# Altium PCB PCB1.pcbdoc
Units mil, origin at the board's own origin, x right, y up, seen from the top; angles counter-clockwise.
Board outline 1480 x 2560 mil, 2 copper layers (Top Layer, Bottom Layer), stack 62.206 mil thick; 53 components, 46 nets, 201 pads, 81 vias.
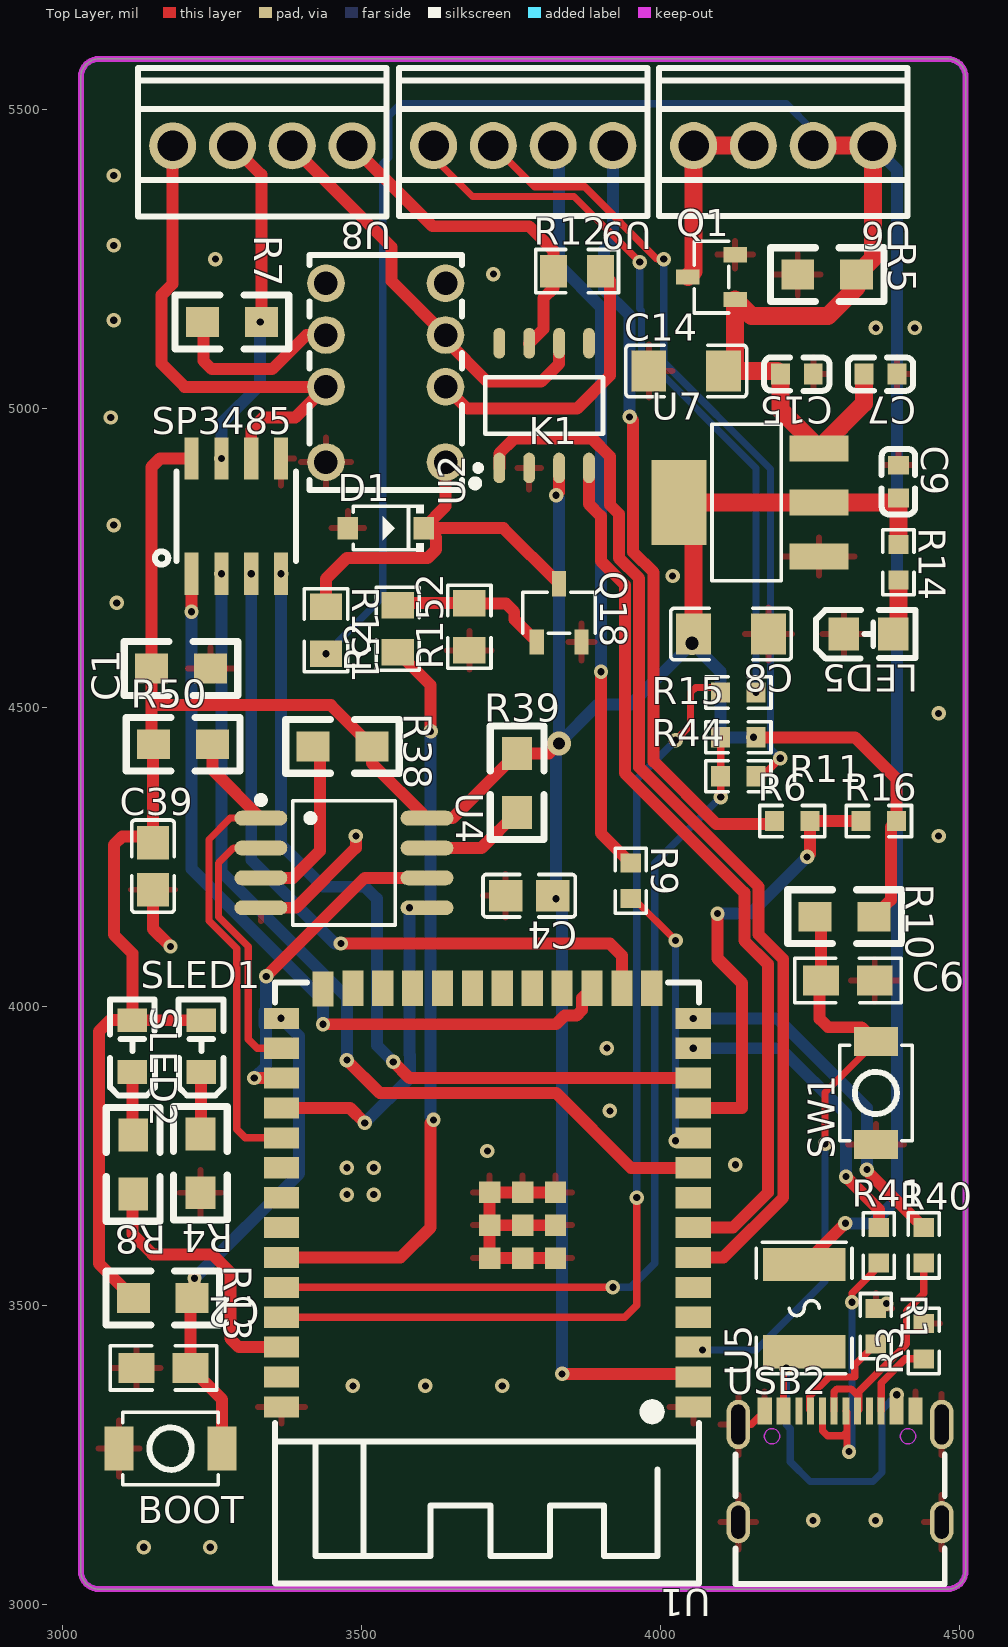
[diagram p0: Top Layer view]
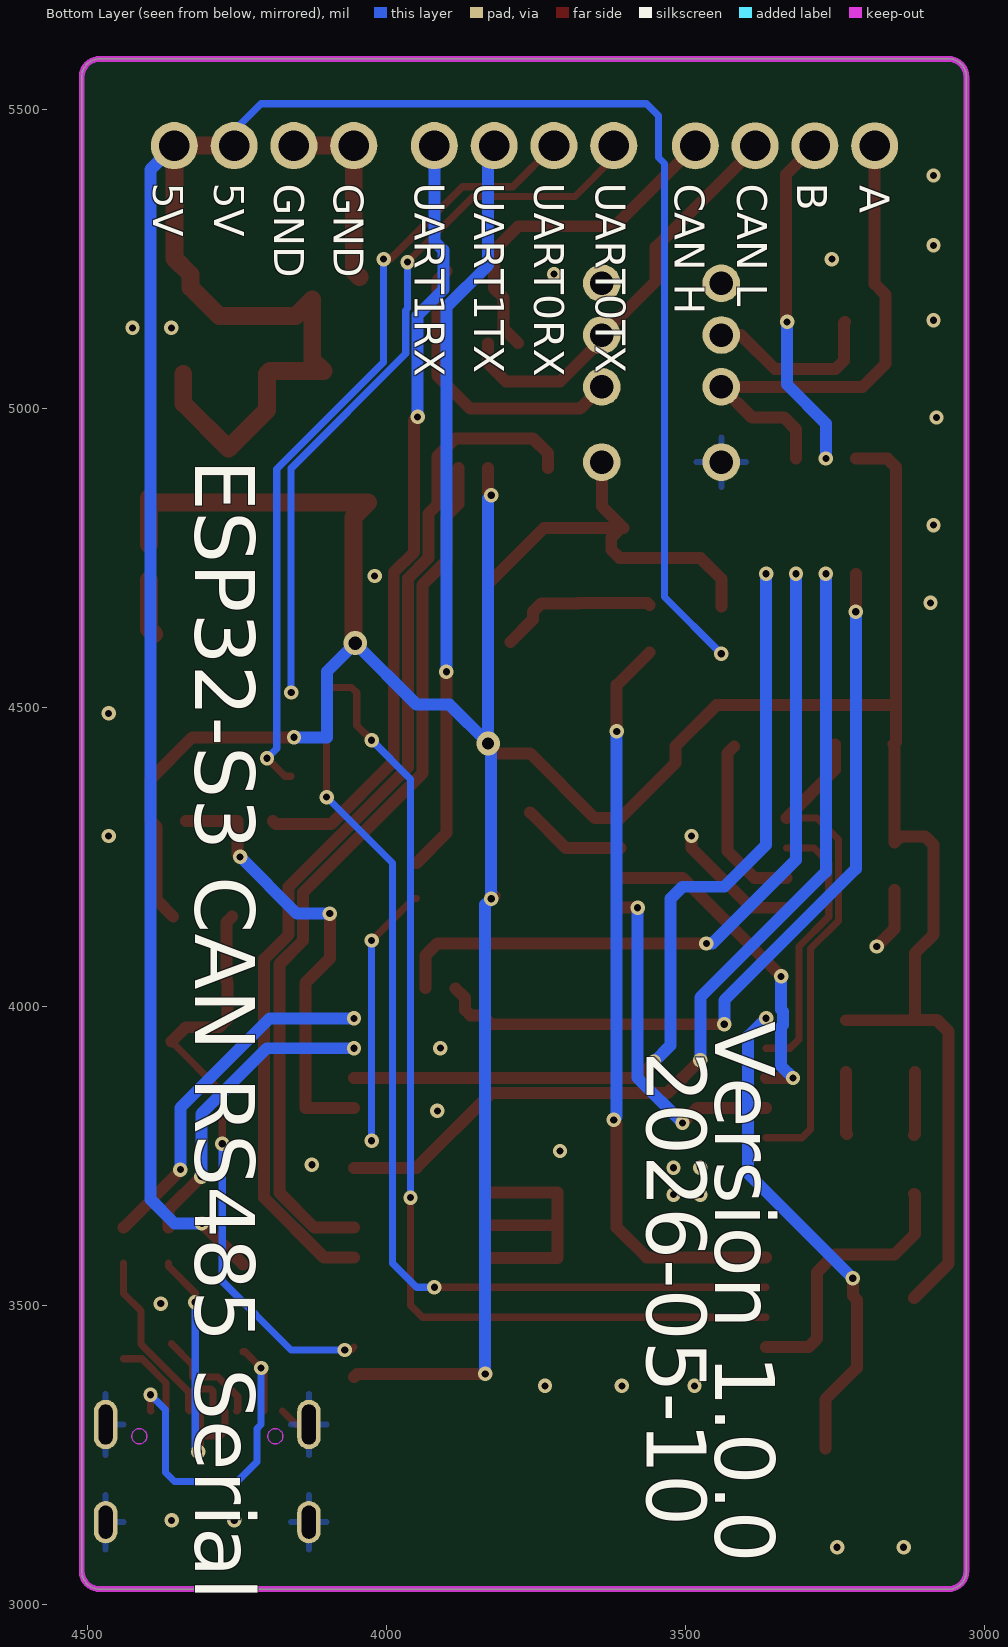
[diagram p1: Bottom Layer view, seen from below]

## Layer stack, top to bottom
Top Solder Mask Layer: solder mask 0.394, Dk 3.3
Top Layer: signal copper 1.379
Dielectric1: surface 59.449, FR4, Dk 4.5
Bottom Layer: signal copper 1.378
Bottom Solder Mask Layer: solder mask 0.394, Dk 3.3

## Board outline
3060,5585 4480,5585 cw(c4480,5555) 4510,5555 4510,3055 cw(c4480,3055) 4480,3025 3060,3025 cw(c3060,3055) 3030,3055 3030,5555 cw(c3060,5555)

## Design rules (kind name [scope] priority, off if disabled: settings)
BoardOutlineClearance copperThickness1oz [All] p0: genericclearance=10 ignorepadtopadclearanceinfootprint=FALSE except(0: Arc-SplitContinuation Track-SplitContinuation SMDPad-SplitContinuation THPad-SplitContinuation Via-SplitContinuation Fill-SplitContinuation Poly-SplitContinuation Region-SplitContinuation Text-SplitContinuation)
BoardOutlineClearance copperThickness2oz [All] p0: genericclearance=10 ignorepadtopadclearanceinfootprint=FALSE except(0: Arc-SplitContinuation Track-SplitContinuation SMDPad-SplitContinuation THPad-SplitContinuation Via-SplitContinuation Fill-SplitContinuation Poly-SplitContinuation Region-SplitContinuation Text-SplitContinuation)
BoardOutlineClearance otherClearance [All] p0: genericclearance=10 ignorepadtopadclearanceinfootprint=FALSE except(0: Arc-SplitContinuation Track-SplitContinuation SMDPad-SplitContinuation THPad-SplitContinuation Via-SplitContinuation Fill-SplitContinuation Poly-SplitContinuation Region-SplitContinuation Text-SplitContinuation)
Clearance copperThickness1oz [All] p1: gap=7 ignorepadtopadclearanceinfootprint=FALSE
Clearance copperThickness2oz [All] p1: gap=7 ignorepadtopadclearanceinfootprint=FALSE
Clearance otherClearance [All] p1: gap=7 ignorepadtopadclearanceinfootprint=FALSE
DiffPairsRouting differentialPair [All] p1: maxuncoupledlength=10 minlimit=6 maxlimit=Infinity mostfreqgap=6 toplayer_minwidth=5 toplayer_prefwidth=10 toplayer_maxwidth=100 bottomlayer_minwidth=5 bottomlayer_prefwidth=10 bottomlayer_maxwidth=100
PasteMaskExpansion pasteMaskExpansion [All] p1: expansion=0
PlaneConnect innerPlane [All] p1: planeconnectstyle=Relief reliefexpansion=20 reliefentries=4 reliefconductorwidth=10 reliefairgap=10
PolygonConnect copperRegion [All] p1: connectstyle=Relief reliefentries=4 reliefconductorwidth=10 polygonreliefangle="90 Angle" airgapwidth=10
RoutingVias viaSize [All] p1: viastyle="Through Hole" holewidth=12.0078 minholewidth=11.811 maxholewidth=248.0314 width=12.0078 minwidth=11.811 maxwidth=248.0314
SolderMaskExpansion solderMaskExpansion [All] p1: useseparateexpansions=TRUE expansion=2 expansionbottom=2
Width copperThickness1oz [All] p1: maxlimit=100 minlimit=5 preferedwidth=10
Width copperThickness2oz [All] p1: maxlimit=100 minlimit=8 preferedwidth=10

## Components (designator, comment, footprint, x,y, rotation, side; value= is the part's Value field where it differs from the comment)
BOOT "" SW-SMD_L3.9-W3.0-P4.45 3180,3260 r0 top
C1 "" ?#1 3095,4510 r180 top
C2 "" ?#2 3329.28,3512.09 r180 top
C4 "" C0805 3780,4185 r180 top
C6 "" ?#2 4152.09,3926.11 r0 top
C7 "" C0603 4367.72,5057.76 r180 top
C8 "" ?#3 4117.72,4622.76 r180 top
C9 "" C0603 4397.72,4877.76 r270 top
C14 "" ?#3 4042.72,5062.76 r0 top
C15 "" C0603 4227.72,5057.76 r180 top
C39 "" C0805 3150.63,4234.37 r270 top
D1 "" SOD-123_L2.7-W1.6-LS3.7-FD 3540,4800 r0 top
K1 "" RELAY-TH_HFDXXX 3540,5060 r90 top
LED5 "" ?#4 4347.72,4622.76 r180 top
Q1 "" SOT-23-3_L2.9-W1.3-P1.90-LS2.4-BR 4085,5220 r0 top
Q18 "" SOT-23-3_L2.9-W1.6-P1.90-LS2.8-BR 3830,4658.29 r270 top
R1 "" R0603 4360,3465 r90 top
R2 "" R0805 3560,4631.69 r90 top
R3 "" R0603 4440,3440 r90 top
R4 "" ?#1 3285,3635 r270 top
R5 "" ?#1 4380.89,5279.1 r0 top
R6 "" R0603 4220,4310 r0 top
R7 "" ?#1 3385,5200 r0 top
R8 "" ?#1 3172.59,3633.14 r270 top
R9 "" R0603 3950,4210 r270 top
R10 "" ?#1 4410,4205 r0 top
R11 "" R0603 4130,4385 r180 top
R12 "" R0805 3860,5230 r0 top
R13 "" ?#1 3269.28,3567.09 r0 top
R14 "" R0603 4397.72,4742.76 r270 top
R15 "" R0603 4130,4525 r180 top
R16 "" R0603 4365,4310 r0 top
R38 "" ?#1 3570,4490 r0 top
R39 "" ?#1 3704.8,4476.2 r90 top
R40 "" R0603 4440,3600 r90 top
R41 "" R0603 4365,3600 r90 top
R44 "" R0603 4130,4450 r0 top
R50 "" ?#1 3098.5,4383.3 r180 top
R151 "" R0805 3440,4629.19 r270 top
R152 "" R0805 3680,4635 r90 top
SLED1 "" ?#5 3231.21,3933.4 r90 top
SLED2 "" ?#5 3116.21,3933.4 r90 top
SP3485 "" SO-8_L4.9-W3.9-P1.27-LS6.0-BL 3290,4820 r0 top
SW1 "" SW-SMD_L3.9-W3.0-P4.45 4360,3855 r90 top
U1 "" WIRELM-SMD_ESP32-S3-WROOM-1 3710,3680 r180 top
U2 "" SO-8 3805,5005 r90 top
U4 "" SOIC-8_L5.3-W5.3-P1.27-LS8.0-BL 3470,4239.86 r270 top
U5 "" F1812 4240,3495 r90 top
U6 "" CONN-TH_4P-P2.54_KF128-2.54-4P 4205,5440 r180 top
U7 "" ?#6 4147.72,4842.76 r0 top
U8 "" CONN-TH_4P-P2.54_KF128-2.54-4P 3333.57,5439.59 r180 top
U9 "" CONN-TH_4P-P2.54_KF128-2.54-4P 3770,5440 r180 top
USB2 "" USB-C-SMD_TYPE-C16PIN 4300,3230 r0 top

## Footprints (in the part's own frame and the unit in brackets; to place one, negate y for a bottom-side part, rotate by r counter-clockwise, add the part's x,y. Pads: shape width x height; smd on the part's side, far side on the other; paste and mask are expansions set on the pad)
C0603 [mm]
  rect 0.8x0.9 smd: 1(-0.7,0) 2(0.7,0)
  silkscreen extent -1.39,-0.71 1.39,0.71
C0805 [mm]
  rect 1.41x1.35 smd: 1(-1,0) 2(1,0)
  silkscreen extent -1.96,-0.9 1.96,0.9
CONN-TH_4P-P2.54_KF128-2.54-4P [mm]
  round 2 hole 1.3: 1(-3.81,0) 2(-1.27,0) 3(1.27,0) 4(3.81,0)
  silkscreen extent -5.28,-3.3 5.28,3
F1812 [mil]
  rect 55.38x137.76 smd: 1(-72.97,0) 2(72.97,0)
  silkscreen extent -110,-80 110,80
R0603 [mil]
  rect 31.75x34.02 smd: 1(-29.66,0) 2(29.66,0)
  silkscreen extent -55,-26 55,26
R0805 [mm]
  rect 1.133x1.377 smd: 1(-1,0) 2(1,0)
  silkscreen extent -1.76,-0.92 1.76,0.92
RELAY-TH_HFDXXX [mm]
  round 1.6 hole 1: 1(-3.8,-2.54) 2(-0.6,-2.54) 3(1.6,-2.54) 4(3.8,-2.54) 5(3.8,2.54) 6(1.6,2.54) 7(-0.6,2.54) 8(-3.8,2.54)
  silkscreen extent -4.99,-3.95 5.01,3.25
SO-8 [mm]
  oval 1.3x0.5 smd: 1(-2.65,1.905) 2(-2.65,0.635) 3(-2.65,-0.635) 4(-2.65,-1.905) 5(2.65,-1.905) 6(2.65,-0.635) 7(2.65,0.635) 8(2.65,1.905)
  silkscreen extent -2.77,-2.5 1.2,2.93
SO-8_L4.9-W3.9-P1.27-LS6.0-BL [mm]
  rect 0.6x1.8 smd: 1(-1.905,-2.45) 2(-0.635,-2.45) 3(0.635,-2.45) 4(1.905,-2.45) 5(1.905,2.45) 6(0.635,2.45) 7(-0.635,2.45) 8(-1.905,2.45)
  silkscreen extent -3.46,-2.06 2.54,1.91
SOD-123_L2.7-W1.6-LS3.7-FD [mm]
  rect 0.88x0.96 smd: 1(-1.61,0) 2(1.61,0)
  silkscreen extent -1.38,-1 1.6,1
SOIC-8_L5.3-W5.3-P1.27-LS8.0-BL [mm]
  oval 0.63x2.25 smd: 1(-1.905,-3.53) 2(-0.635,-3.53) 3(0.635,-3.53) 4(1.905,-3.53) 5(1.905,3.53) 6(0.635,3.53) 7(-0.635,3.53) 8(-1.905,3.53)
  silkscreen extent -2.82,-3.68 2.64,2.18
SOT-23-3_L2.9-W1.3-P1.90-LS2.4-BR [mm]
  rect 1x0.65 smd: 1(1,-0.95) 2(1,0.95) 3(-1,0)
  silkscreen extent -0.73,-1.53 0.73,1.53
SOT-23-3_L2.9-W1.6-P1.90-LS2.8-BR [mm]
  rect 1.07x0.6 smd: 1(1.235,-0.95) 2(1.235,0.95) 3(-1.235,0)
  silkscreen extent -0.88,-1.54 0.88,1.54
SW-SMD_L3.9-W3.0-P4.45 [mm]
  rect 1.23x1.86 smd: 1(-2.185,0) 2(2.185,0)
  silkscreen extent -2.03,-1.54 2.03,1.54
USB-C-SMD_TYPE-C16PIN [mm]
  oval 1x2.1 hole 0.6 slot 1.7 at 90 deg: 1(-4.32,1.787) 2(4.32,1.787)
  oval 1x1.8 hole 0.6 slot 1.4 at 90 deg: 3(-4.32,-2.362) 4(4.32,-2.362)
  rect 0.6x1.15 smd: A1B12(-3.2,2.362) A4B9(-2.4,2.362) B1A12(3.2,2.362) B4A9(2.4,2.362)
  rect 0.3x1.15 smd: A5(-1.25,2.362) A6(-0.25,2.362) A7(0.25,2.362) A8(1.25,2.362) B5(1.75,2.362) B6(0.75,2.362) B7(-0.75,2.362) B8(-1.75,2.362)
  Board Outline Layer circle w0.003: c2.89,1.288 r0.325
  Board Outline Layer circle w0.003: c-2.89,1.288 r0.325
  Board Outline Layer region: 3.215,1.288 3.183,1.147 3.093,1.034 2.962,0.971 2.818,0.971 2.687,1.034 2.597,1.147 2.565,1.288 2.565,1.288 2.597,1.429 2.687,1.542 2.818,1.605 2.962,1.605 3.093,1.542 3.183,1.429 3.215,1.288
  Board Outline Layer region: 3.215,1.288 3.183,1.147 3.093,1.034 2.962,0.971 2.818,0.971 2.687,1.034 2.597,1.147 2.565,1.288 2.565,1.288 2.597,1.429 2.687,1.542 2.818,1.605 2.962,1.605 3.093,1.542 3.183,1.429 3.215,1.288
  Board Outline Layer region: -2.565,1.288 -2.597,1.147 -2.687,1.034 -2.818,0.971 -2.962,0.971 -3.093,1.034 -3.183,1.147 -3.215,1.288 -3.215,1.288 -3.183,1.429 -3.093,1.542 -2.962,1.605 -2.818,1.605 -2.687,1.542 -2.597,1.429 -2.565,1.288
  Board Outline Layer region: -2.565,1.288 -2.597,1.147 -2.687,1.034 -2.818,0.971 -2.962,0.971 -3.093,1.034 -3.183,1.147 -3.215,1.288 -3.215,1.288 -3.183,1.429 -3.093,1.542 -2.962,1.605 -2.818,1.605 -2.687,1.542 -2.597,1.429 -2.565,1.288
  silkscreen extent -4.45,-5 4.45,0.52
WIRELM-SMD_ESP32-S3-WROOM-1 [mm]
  rect 1.5x0.9 smd: 1(-8.75,8.895) 2(-8.75,7.625) 3(-8.75,6.355) 4(-8.75,5.085) 5(-8.75,3.815) 6(-8.75,2.545) 7(-8.75,1.275) 8(-8.75,0.005) 9(-8.75,-1.265) 10(-8.75,-2.535) 11(-8.75,-3.805) 12(-8.75,-5.075) 13(-8.75,-6.345) 14(-8.75,-7.615) 27(8.75,-7.615) 28(8.75,-6.345) 29(8.75,-5.075) 30(8.75,-3.805) 31(8.75,-2.535) 32(8.75,-1.265) 33(8.75,0.005) 34(8.75,1.275) 35(8.75,2.545) 36(8.75,3.815) 37(8.75,5.085) 38(8.75,6.355) 39(8.75,7.625) 40(8.75,8.895)
  rect 0.9x1.5 smd: 15(-6.985,-8.895) 16(-5.715,-8.895) 17(-4.445,-8.895) 18(-3.175,-8.895) 19(-1.905,-8.895) 20(-0.635,-8.895) 21(0.635,-8.895) 22(1.905,-8.895) 23(3.175,-8.895) 24(4.445,-8.895) 25(5.715,-8.895) 26(6.985,-8.865)
  rect 0.9x0.9 smd: 41(-2.9,2.575) 41(-2.9,-0.225) 41(-2.9,1.175) 41(-1.5,2.575) 41(-1.5,1.175) 41(-1.5,-0.225) 41(-0.1,2.575) 41(-0.1,1.175) 41(-0.1,-0.225)
  silkscreen extent -9,-9.14 9.02,16.39
?#1 [mil]
  rect 55.1x50 smd: 1(-151.6,-55.1) 2(-53.1,-55.1)
  silkscreen extent -197,-100 -7,-10
?#2 [mil]
  rect 60x50 smd: 1(116,117) 2(206,117)
  silkscreen extent 72,80 250,154
?#3 [mil]
  rect 58.47x68.03 smd: 1(-62.7,0) 2(62.7,0)
  silkscreen extent -101,-43 101,43
?#4 [mil]
  rect 51.2x55.1 smd: 1(-41.35,0) 2(41.35,0)
  silkscreen extent -78,-40 88,41
?#5 [mil]
  rect 39.37x49.21 smd: 1(43.31,0) 2(-43.31,0)
  silkscreen extent -83,-37 78,38
?#6 [mil]
  rect 98.42x43.31 smd: 1(116.93,-90.55) 2(116.93,0) 3(116.93,90.55)
  rect 92.13x141.73 smd: 4(-116.93,0)
  silkscreen extent -62,-131 54,131

## Via types
v1: diameter 24.02, hole 12.01, Top Layer to Bottom Layer, 49 vias
v2: diameter 24, hole 12, Top Layer to Bottom Layer, 30 vias
v3: diameter 40, hole 20, Top Layer to Bottom Layer, 1 vias
v4: diameter 40, hole 22, Top Layer to Bottom Layer, 1 vias

## Nets (pads, with @x,y where several pads share a name; then routed paths per layer and width w, separated by ;. In a path a pad name is that pad's centre, name@x,y a point inside that pad or via, vN(x,y) a via of type N, cw(c..) or ccw(c..) an arc to the next point about the centre after c; other vN are vias at no path point)
5V: C7.2 C14.2 C15.2 Q1.1 R5.2 R151.2 U5.2 U6.1 U6.2 U7.3 | length 4799.9
  Top Layer w20: U5.2 v1(4309.02,3636.99)
  Top Layer w30: U6.2 U6.1 4355,5251.21 R5.2 4327.79,5202.79 4280,5155 4151.97,5155 Q1.1 4124.37,5081.7 C14.2 4195.16,5062.76 C15.2 4200.16,4997.79 U7.3 4340.16,5008.82 C7.2
  Bottom Layer w12: v1(3440,4589.82) 3535,4684.82 3535,5410 3545,5420 3545,5490 3565,5510 4210,5510 4255,5465 U6.2
  Bottom Layer w20: v1(4309.02,3636.99) 4355,3636.99 4395,3676.99 4395,5400 U6.1
485B: K1.6 R7.1 | length 300.1
  Top Layer w20: R7.1 3235,5143.3 3235,5080 3249.14,5065.86 3350,5065.86 3407.14,5123 K1.6
$1N78: LED5.1 R14.2 | length 93.9
  Top Layer w30: LED5.1 4397.72,4631.41 R14.2
$1N100: R4.1 SLED1.2 | length 104
  Top Layer w20: R4.1 3231.21,3787.91 SLED1.2
$1N103: R8.1 SLED2.2 | length 105.9
  Top Layer w20: SLED2.2 3116.21,3786.02 R8.1
$1N170: R38.1 U4.3 | length 297.4
  Top Layer w20: U4.3 3384.86,4214.86 3430,4260 3430,4423.3 R38.1
$1N176: U5.1 USB2.A4B9 USB2.B4A9 | length 606.1
  Top Layer w12: USB2.A4B9 v1@4205.51,3387.54 ; v1(4210,3395) 4237.03,3422.03 U5.1 ; USB2.B4A9 4395,3323.52 v1(4395,3350)
  Bottom Layer w12: v1(4210,3395) 4210,3300.21 4216.83,3293.39 4216.83,3238.17 4250,3205 4355,3205 4370,3220 4370,3325 v1(4395,3350)
$1N178: R40.1 USB2.A6 USB2.B6 | length 373.8
  Top Layer w12: USB2.A6 4290.16,3355.16 4295,3360 4318.34,3360 4331.32,3347.02 ; USB2.B6 4331.32,3324.8 4331.32,3347.02 ; R40.1 4440,3519.49 4411.01,3490.5 4411.01,3434.78 4331.32,3355.09 4331.32,3347.02
$1N179: R41.1 USB2.A7 USB2.B7 | length 486.6
  Top Layer w12: USB2.B7 4270.47,3290 4278.96,3281.51 4305,3281.51 4311.64,3288.15 ; USB2.A7 4311.64,3321.21 4311.64,3288.15 ; v1(4315,3255) 4311.64,3258.36 4311.64,3288.15 ; v1(4320,3505) 4320,3520 4365,3565 R41.1
  Bottom Layer w12: v1(4315,3255) 4320,3260 v1(4320,3505)
$1N183: R1.1 USB2.A5 | length 184.1
  Top Layer w12: USB2.A5 4248.99,3324.81 4248.99,3347.02 4281.97,3380 4324.66,3380 4324.66,3400 R1.1
$1N184: R3.1 USB2.B5 | length 134.8
  Top Layer w12: USB2.B5 4368.9,3370.02 4409.22,3410.34 R3.1
$1N209: BOOT.2 C2.1 R13.2 U1.27 | length 829.5
  Top Layer w20: v1(3220,3545) 3220,3515.81 R13.2 3213.28,3509.09 C2.1 3266.02,3342.35 BOOT.2
  Bottom Layer w20: v1(3220,3545) 3395,3720 3395,3950 v1(3365,3980)
$1N275: Q18.1 R2.2 R152.2 | length 268.2
  Top Layer w20: R2.2 3563.31,4674.37 R152.2 3680.23,4674.14 3740.86,4674.14 3755,4660 3755,4647.26 Q18.1
$1N280: D1.2 K1.1 Q18.3 R151.1 | length 684.1
  Top Layer w20: R151.1 3440,4715 3475,4750 3610,4750 3624.14,4764.14 3624.14,4784.14 D1.2@3608.28,4800 ; K1.1 3640,4836.61 D1.2 D1.2@3608.28,4800 ; Q18.3 3736.91,4800 D1.2@3608.28,4800
$1N294: R39.1 U4.7 | length 175.7
  Top Layer w20: U4.7 3700.16,4264.86 R39.1
$1N296: R6.1 U9.1 | length 1318.5
  Top Layer w20: v1(3948.06,4986.05) 3954.02,4980.09 3954.02,4759.95 3988.03,4725.93 3988.03,4409.9 4092.93,4305 4185.34,4305 R6.1
  Bottom Layer w20: U9.1 3920,5280 3905,5265 3905,5198.96 3948.06,5155.91 v1(3948.06,4986.05)
$1N298: R9.1 U9.2 | length 1254.2
  Top Layer w20: v1(3900,4559.66) 3900,4289.66 R9.1
  Bottom Layer w20: U9.2 3830,5430 3830,5240 3900,5170 v1(3900,4559.66)
$1N300: R11.1 U9.3 | length 1332.2
  Top Layer w12: U9.3 3788.98,5371.02 3872.91,5371.02 3993.93,5250 v1(4005,5250) ; R11.1 4170,4385 v1(4200,4415)
  Bottom Layer w12: v1(4005,5250) 4005,5077.65 4183.65,4899 4183.65,4431.35 v1(4200,4415)
$1N302: R15.1 U9.4 | length 1238.1
  Top Layer w12: U9.4 3620,5420 3685,5355 3855,5355 v1(3965,5245)
  Bottom Layer w12: v1(3965,5245) 3965,5167.27 3968.07,5164.2 3968.07,5091.93 4159.66,4900.34 v1(4159.66,4525)
CAN120_H: K1.2 R12.2 | length 494.3
  Top Layer w20: K1.2 3676.4,5000 3860,5000 3915,5055 3915,5214.37 R12.2
CAN_H: R12.1 U2.7 U8.1 | length 581.5
  Top Layer w20: U8.1 3618.16,5305 3780,5305 3820.63,5264.37 R12.1 3820.63,5201.72 3804.17,5185.26 3804.17,5133.5 U2.7
CAN_L: K1.3 U2.6 U8.2 | length 696.6
  Top Layer w20: U8.2 3383.57,5436.43 3550,5270 3550,5213 K1.3 3640,5115 3710,5045 3800,5045 3830,5075 U2.6
D+: R40.2 U1.14 | length 592.3
  Top Layer w20: v1(4345,3726.78) 4345,3724.66 R40.2
  Bottom Layer w20: v1(4054.49,3979.8) 4195.19,3979.8 4345,3830 v1(4345,3726.78)
D-: R41.2 U1.13 | length 514.1
  Top Layer w20: v1(4310,3715) 4365,3660 R41.2
  Bottom Layer w20: v1(4054.49,3929.8) 4200.19,3929.8 4310,3820 v1(4310,3715)
EN: C6.1 R10.1 SW1.2 U1.3 | length 992
  Top Layer w12: U1.3 4059.3,3425 v1(4070,3425) ; v1(4275,3770) 4275,3856.02 SW1.2
  Top Layer w20: R10.1 4268.09,4140.21 C6.1 4265.86,4040.88 4265.86,3979.14 4280,3965 4336.02,3965 SW1.2
  Bottom Layer w12: v1(4070,3425) 4160,3425 4275,3540 v1(4275,3770)
FLASH_CS: R50.1 U1.31 U4.1 | length 843.6
  Top Layer w12: U4.1 3279.86,4314.86 3244.18,4279.18 3244.18,4143.18 3290.86,4096.49 3290.86,3794.14 3305,3780 3365.32,3780 U1.31
  Top Layer w20: R50.1 3250.1,4395.78 U4.1
GND: BOOT.1 C1.1 C2.2 C4.2 C6.2 C7.1 C8.1 C9.1 C14.1 C15.1 C39.2 D1.1 K1.8 LED5.2 Q1.2 Q18.2 R1.2 R3.2 R4.2 R5.1 R152.1 SP3485.5 SW1.1 U1.1 U1.40 U1.41 U2.2 U4.4 U7.1 USB2.1 USB2.2 USB2.3 USB2.4 USB2.A1B12 USB2.B1A12 | length 822.1
  Top Layer w12: USB2.1 4151.37,3300.37 USB2.A1B12
  Top Layer w20: C39.2 3150.63,4129.37 v2(3180,4100) ; U4.4 3389.86,4164.86 3490,4265 v2(3490,4285) ; U1.41@3824.18,3578.62 3769.06,3578.62 3713.94,3578.62 U1.41@3713.94,3633.74 ; U1.41@3824.18,3633.74 3769.06,3633.74 U1.41@3713.94,3633.74 ; U1.41@3824.18,3688.86 3769.06,3688.86 3713.94,3688.86 U1.41@3713.94,3633.74
  other v1: 4377.72,3502.53
  other v2: 3135,3095 3246.29,3095 4255,3140 4359.59,3140 3485,3365 3606.37,3365 3735,3365 3475,3685 3520,3685 3475,3730 3520,3730 4125,3735 3710,3757.9 3915,3825 3910,3930 4465,4285 4465,4490 3090,4675 4020,4720 3085,4805 3080,4985 4360,5135 4425,5135 3085,5147.82 3720,5225 3255,5250 3085,5273.06 3085,5390
GNDIN: Q1.3 U6.3 U6.4 | length 323.9
  Top Layer w30: Q1.3 4055,5229.37 U6.4 U6.3
LED: R8.2 U1.38 | length 460.6
  Top Layer w20: R8.2 3116.23,3684.98 3116.23,3618.77 3150,3585 3250,3585 3280,3555 3280,3443.95 3294.14,3429.8 U1.38
RELAYIO: R2.1 U1.35 | length 1259.5
  Top Layer w20: U1.35 3365.7,3580 3565,3580 3615,3630 3615,3805 v1(3620,3810) ; R2.1 3615,4537.32 v1(3615,4460)
  Bottom Layer w20: v1(3615,4460) 3615,3815 v1(3620,3810)
RS485_A: K1.7 SP3485.6 U8.4 | length 866.4
  Top Layer w20: U8.4 3183.57,5208.57 3165,5190 3165,5075 3203.6,5036.4 K1.7 3388.6,4985 3335,4985 3315,4965 SP3485.6
RS485_B: R7.2 SP3485.7 U8.3 | length 572.1
  Top Layer w20: U8.3 3331.9,5391.26 R7.2 3331.8,5145 v1(3330,5145)
  Bottom Layer w20: v1(3265,4916.46) 3265,4975 3330,5040 v1(3330,5145)
SPI3_CLK: U1.29 U4.6 | length 563.7
  Top Layer w20: v1(3320,3880) 3365.32,3880 U1.29 ; v1(3340,4050) 3505,4215 3608.84,4215 U4.6
  Bottom Layer w20: v1(3320,3880) 3340,3900 3340,3965.41 3337.01,3968.41 3337.01,3991.59 3340,3994.59 v1(3340,4050)
SPI3_MISO: U1.28 U4.2 | length 458.7
  Top Layer w12: U4.2 3285.05,4264.86 3260.19,4240 3260.19,4149.81 3310,4100 3310,3944.8 3325,3929.8 U1.28
SPI3_MOSI: U1.30 U4.5 | length 570.3
  Top Layer w20: U1.30 3480.2,3829.8 v1(3505,3805) ; v1(3580,4165) 3608.84,4165 U4.5
  Bottom Layer w20: v1(3505,3805) 3580.52,3880.52 3580.52,3918.65 3580,3919.17 v1(3580,4165)
TWAI_RX: U1.7 U2.4 | length 1485.3
  Top Layer w20: U2.4 3880,4840 3900,4820 3900,4745 3940,4705 3940,4390 4139.95,4190.05 4139.95,4110 4179.14,4070.86 4179.14,3688.11 4120.84,3629.8 U1.7
TWAI_TX: U1.6 U2.1 | length 1784.2
  Top Layer w20: U2.1 3730,4925 3755,4950 3885,4950 3915,4920 3915,4838.96 3930,4823.96 3930,4750 3964.02,4715.98 3964.02,4399.95 4163.96,4200 4163.96,4120 4205,4078.96 4205,3680 4104.81,3579.8 U1.6
UART0RX: R11.2 R44.1 U1.36 | length 1566.8
  Top Layer w12: U1.36 3365.7,3530 v1(3920,3530) ; v1(4100.34,4350) R11.2 R44.1
  Bottom Layer w12: v1(3920,3530) 3950,3530 3990,3570 3990,4239.66 v1(4100.34,4350)
UART0TX: R15.2 U1.37 | length 1722.5
  Top Layer w12: U1.37 3939.8,3479.8 3960,3500 v1(3960,3680) ; v1(4025,4445) 4050,4470 4050,4525 4058.49,4533.49 4091.85,4533.49 R15.2
  Bottom Layer w12: v1(3960,3680) 3960,4380 v1(4025,4445)
UART1RX: R6.2 R16.1 U1.11 | length 760.6
  Top Layer w20: U1.11 4135.93,3829.8 4135.93,4039.07 4095,4080 v1(4095,4155) ; v1(4245,4250) 4249.66,4254.66 R6.2 R16.1
  Bottom Layer w20: v1(4095,4155) 4150,4155 v1(4245,4250)
UART1TX: R9.2 U1.10 | length 439.1
  Top Layer w12: R9.2 3954.66,4180.34 v1(4025,4110)
  Bottom Layer w12: v1(4025,3775) v1(4025,4110)
UART2_RX: SP3485.1 U1.17 | length 1331.2
  Top Layer w20: v1(3215,4660) SP3485.1 ; v1(3435,3970) 3824.8,3970 3839.49,3984.68 3859.34,3984.68 3868.7,3994.05 3868.7,4013.9 U1.17
  Bottom Layer w20: v1(3215,4660) 3215,4230 3435,4010 v1(3435,3970)
UART2_TX: SP3485.4 U1.12 | length 1448.4
  Top Layer w20: v1(3552.53,3907.05) 3579.78,3879.8 U1.12
  Bottom Layer w20: v1(3365,4723.54) 3365,4270 3435,4200 3505,4200 3525,4180 3525,3934.59 v1(3552.53,3907.05)
UART2DE: SP3485.3 U1.16 | length 1219.6
  Top Layer w20: v1(3465,4105) 3915,4105 3935,4085 U1.16
  Bottom Layer w20: v1(3315,4723.54) 3315,4245 3455,4105 v1(3465,4105)
UART2RE: SP3485.2 U1.9 | length 1554.7
  Top Layer w20: v1(3475,3910) 3530,3855 3825,3855 3950.2,3729.8 U1.9
  Bottom Layer w20: v1(3265,4723.54) 3265,4225 3475,4015 v1(3475,3910)
VCC3V3: C1.2 C4.1 C8.2 C9.2 C39.1 R10.2 R13.1 R14.1 R16.2 R38.2 R39.2 R44.2 R50.2 SLED1.1 SLED2.1 SP3485.8 U1.2 U2.3 U4.8 U7.2 U7.4 | length 6050.7
  Top Layer w20: R13.1 3060,3569.67 3060,3957.93 3079.14,3977.07 SLED2.1@3116.21,3977.07 ; SP3485.8 3162.24,4916.46 3148.1,4902.32 C1.2 3148.1,4503.74 ; SLED1.1 SLED2.1 SLED2.1@3116.21,3977.07 ; C4.1 3820,4185 v1(3825,4180) ; v1(3825,4855) 3830,4860 U2.3 ; v3(3830,4440) 3813.1,4423.1 R39.2 3651.66,4314.86 U4.8 3516.9,4406.94 R38.2 3448.06,4503.74 3148.1,4503.74 ; v1(3835,3385) 4049.3,3385 U1.2 ; v4(4052.5,4607.5) 4055.02,4610.02 C8.2 ; v1(4155,4450) R44.2 4325,4450 4394.66,4380.34 R16.2 4385,4300.34 4385,4178 R10.2 ; SLED2.1@3116.21,3977.07 3116.21,4088.79 3085,4120 3085,4270 3099.14,4284.14 3140.23,4284.14 C39.1 3150.63,4437.43 R50.2 3148.1,4441.9 3148.1,4503.74
  Top Layer w30: C8.2 4055.02,4818.53 U7.4 U7.2 4390.28,4842.76 C9.2 R14.1
  Bottom Layer w20: v1(3825,4855) 3830,4850 v3(3830,4440) ; v1(3835,3385) 3835,4170 v1(3825,4180) 3825,4435 v3(3830,4440) ; v1(4155,4450) 4100,4450 4100,4560 v4(4052.5,4607.5) 3950,4505 3895,4505 v3(3830,4440)
pads on no net: K1.4 K1.5 U1.4 U1.5 U1.8 U1.15 U1.18 U1.19 U1.20 U1.21 U1.22 U1.23 U1.24 U1.25 U1.26 U1.32 U1.33 U1.34 U1.39 U2.5 U2.8 USB2.A8 USB2.B8

## Polygon pours and split planes (outlines as drawn)
GND on Top Layer (solid, remove dead copper, pour order 0): 3000,5615 4545,5615 4545,3000 3000,3000
GND on Bottom Layer (solid, remove dead copper, pour order 2): 3005,5605 4531.81,5605 4531.81,3000 3005,3000

## Keep-outs
Board Outline Layer:
  the board outline again, w10

## Silkscreen, mask and mechanical layers (free items; w line width, h text height)
Bottom Silkscreen Layer:
  text "B" at 3313.03,5378.18 h50 r90
  text "UART0TX" at 3650,5377.73 h50 r90
  text "UART0RX" at 3753.03,5377.73 h50 r90
  text "UART1TX" at 3853.66,5377.73 h50 r90
  text "UART1RX" at 3953.03,5377.73 h50 r90
  text "5V" at 4288.03,5377.58 h50 r90
  text "5V" at 4390,5377.58 h50 r90
  text "CAN L" at 3413.03,5375.76 h50 r90
  text "CAN H" at 3518.03,5375.76 h50 r90
  text "GND" at 4088.03,5375.76 h50 r90
  text "GND" at 4188.03,5375.76 h50 r90
  text "A" at 3208.03,5373.94 h50 r90
  text "MatrixDebugBoard" at 3330,5155 h200 r90
  text "ESP32-S3 CAN RS485 Serial" at 4320,4915 h100 r90
  text "Version 1.0.0" at 3450,3975 h100 r90
  text "2026-05-10" at 3565,3925 h100 r90